# Altium PCB front-panel.PcbDoc
Units mm, origin at the board's own origin, x right, y up, seen from the top; angles counter-clockwise.
Board outline 208 x 111 mm, 2 copper layers (Top Layer, Bottom Layer), stack 1.27 mm thick; 3 components, 3 nets, 38 pads, 32 vias.
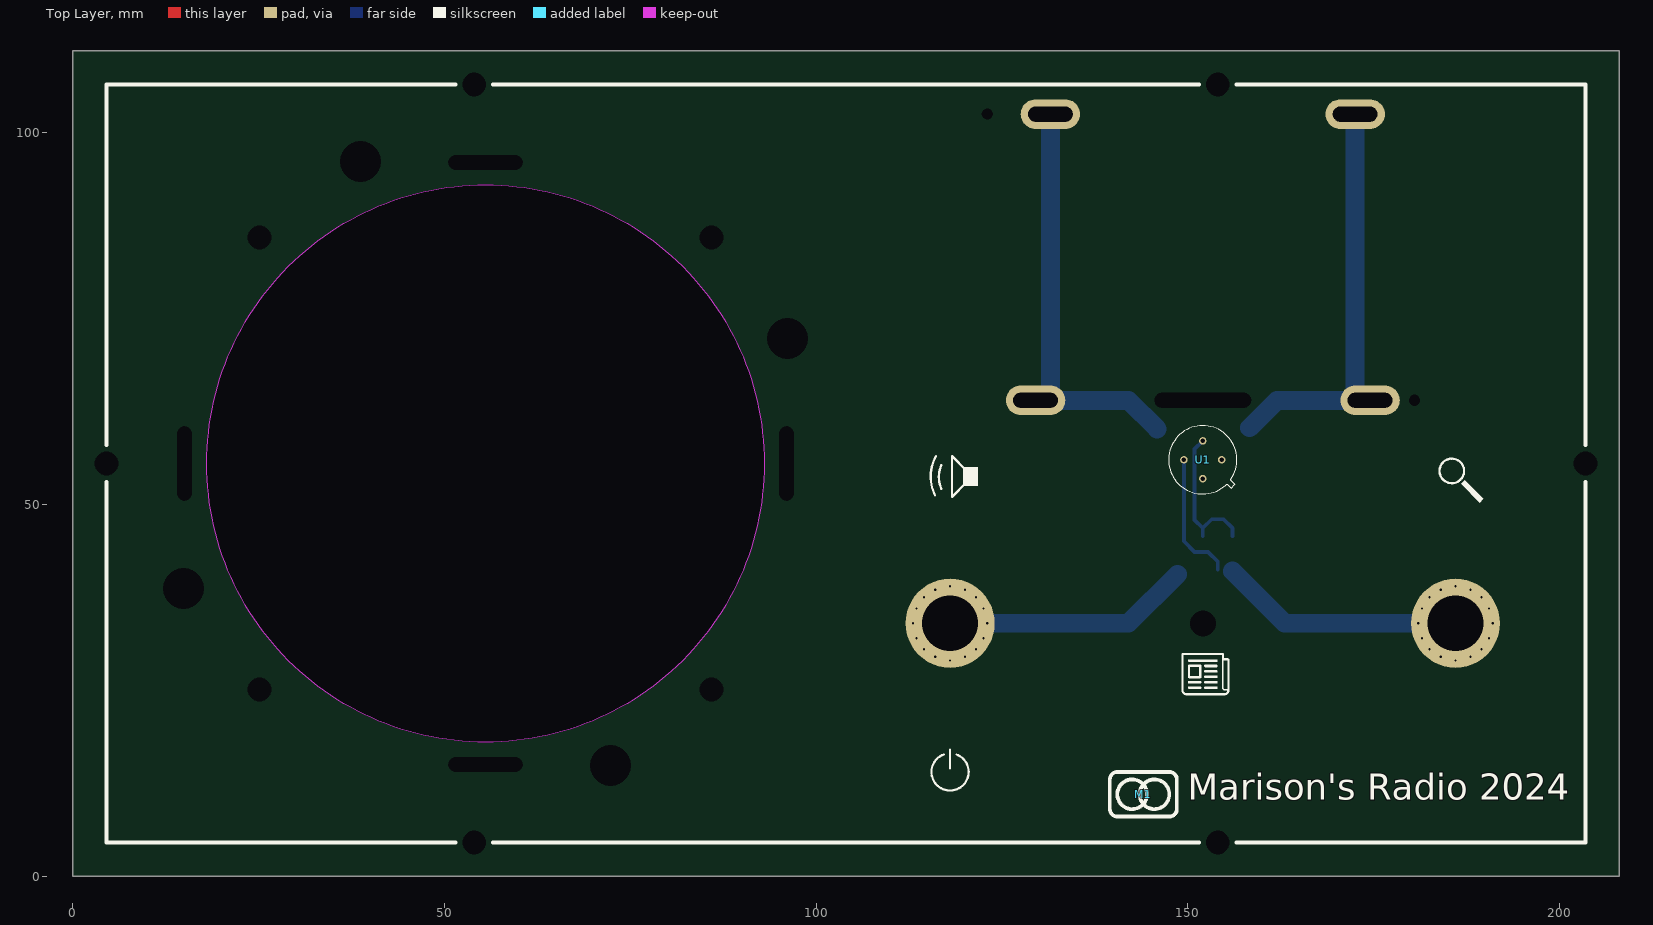
[diagram p0: Top Layer view]
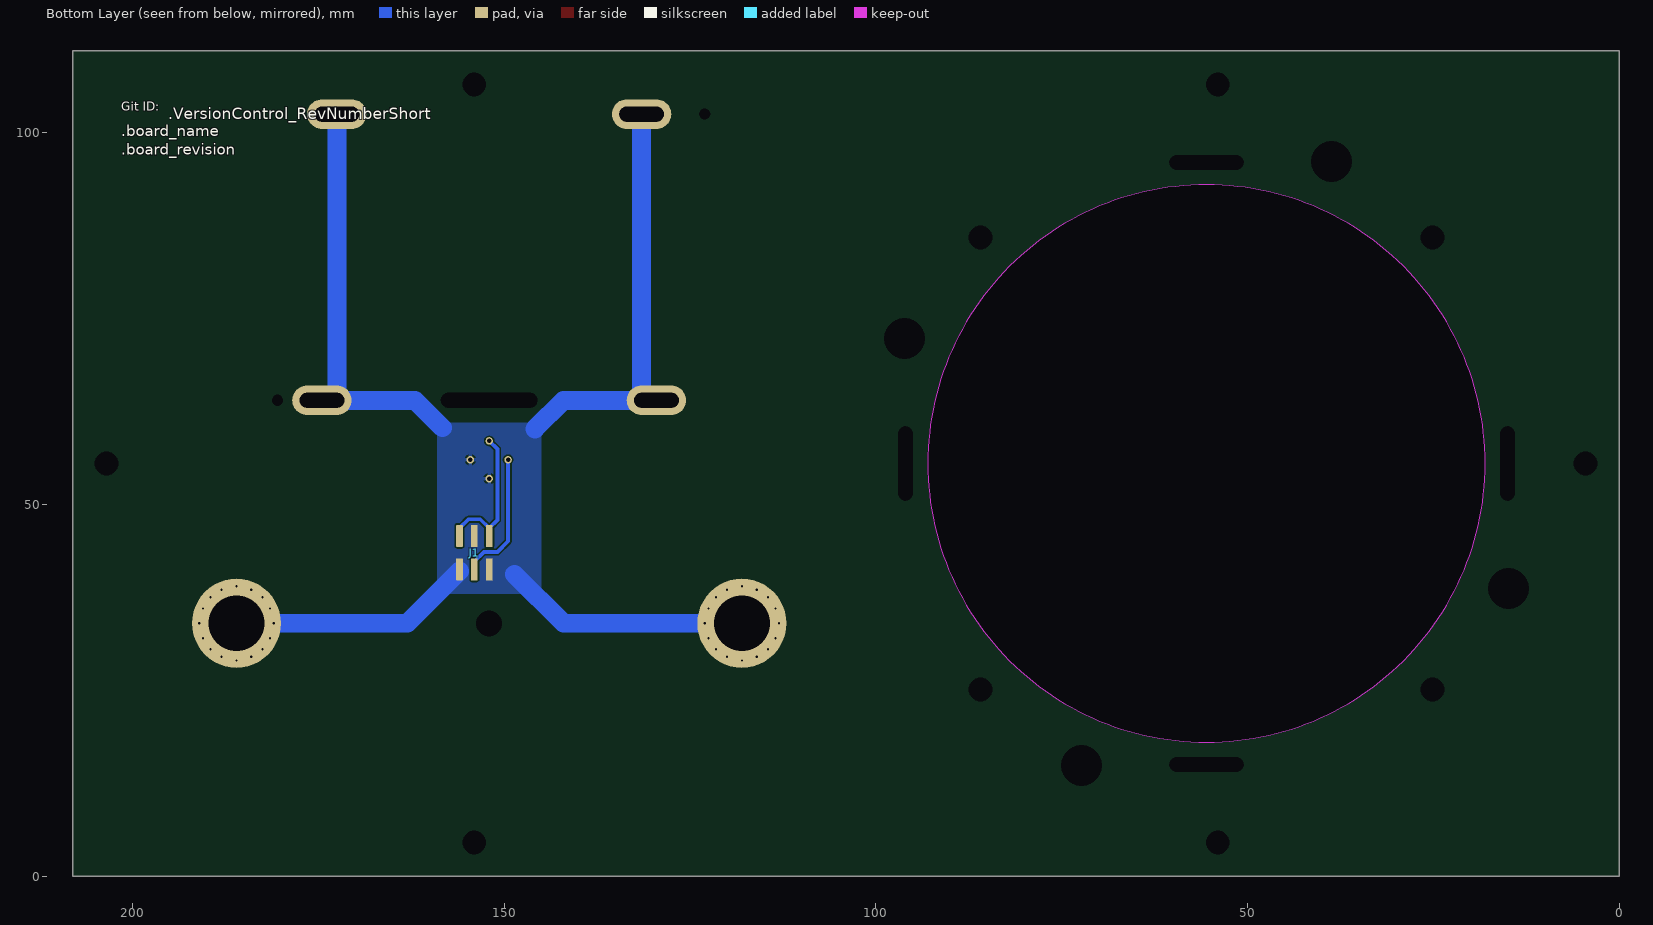
[diagram p1: Bottom Layer view, seen from below]

## Layer stack, top to bottom
Top Solder: solder mask 0.0254, SM-001, Dk 4
Top Layer: signal copper 0.035
Dielectric: core 1.2, Core-042, Dk 4.6
Bottom Layer: signal copper 0.035
Bottom Solder: solder mask 0.0254, SM-001, Dk 4

## Board outline
0,0 0,111 208,111 208,0
cut-out: 55.5,18 cw(c55.5,55.5) 18,55.5 cw(c55.5,55.5) 55.5,93 cw(c55.5,55.5) 93,55.5 cw(c55.5,55.5)

## Design rules (kind name [scope] priority, off if disabled: settings)
BoardOutlineClearance [IsElectrical or IsPoly] p1: gap=0.4 ignorepadtopadclearanceinfootprint=FALSE
Clearance Clearance_NTPH_to_Track [IsTrack vs IsPad and IsThruPin and not PadIsPlated] p1: gap=0.254 ignorepadtopadclearanceinfootprint=FALSE
Clearance Clearance_TH_Pad_to_TH_Pad [IsPad and IsThruPin vs IsPad and IsThruPin] p2: gap=0.5 ignorepadtopadclearanceinfootprint=FALSE
Clearance Clearance_SMT_Pad_to_SMT_Pad [IsPad and IsSMTPin vs IsPad and IsSMTPin] p3: gap=0.127 ignorepadtopadclearanceinfootprint=TRUE
Clearance [All] p4: gap=0.2 ignorepadtopadclearanceinfootprint=FALSE except(0.127: SMDPad-SMDPad)
DiffPairsRouting DiffpairThermal [InDifferentialPair('K1') or InDifferentialPair('K2')] p1: maxlimit=0.254 minlimit=0.254 mostfreqgap=0.254 toplayer_minwidth=0.381 toplayer_maxwidth=0.381 toplayer_prefwidth=0.381 bottomlayer_minwidth=0.381 bottomlayer_maxwidth=0.381 bottomlayer_prefwidth=0.381 maxuncoupledlength=12.7
DiffPairsRouting USB_ext_layer_JLCPCB_4layer_7628 [InDifferentialPair('USB')] p2: maxlimit=0.35 minlimit=0.35 mostfreqgap=0.35 toplayer_minwidth=0.33 toplayer_maxwidth=0.33 toplayer_prefwidth=0.33 bottomlayer_minwidth=0.33 bottomlayer_maxwidth=0.33 bottomlayer_prefwidth=0.33 maxuncoupledlength=12.7
HoleSize NPTH_HoleSize [IsPad And not PadIsPlated] p1: absolutevalues=TRUE maxlimit=2.7 minlimit=0.2 maxpercent=80.000 minpercent=20.000
HoleSize Pad_HoleSize [IsPad] p2: absolutevalues=TRUE maxlimit=2.7 minlimit=0.5 maxpercent=80.000 minpercent=20.000
HoleSize Via_HoleSize [IsVia] p3: absolutevalues=TRUE maxlimit=6.3 minlimit=0.2 maxpercent=80.000 minpercent=20.000
HoleToHoleClearance [All] p1: gap=0.254 allowstackedmicrovias=FALSE
MatchedLengths USB [InDifferentialPair('USB')] p1: tolerance=0.15 checknetsindiffpair=TRUE checkdiffpairvsdiffpair=FALSE checkxsignals=FALSE checkothers=FALSE
MinimumAnnularRing [All] p1: minimumring=0.13
PolygonConnect [All] p1: thpad.connectstyle=Relief thpad.reliefconductorwidth=0.5 thpad.reliefentries=4 thpad.polygonreliefangle="90 Angle" thpad.airgapwidth=0.254 smdpad.connectstyle=Direct smdpad.reliefconductorwidth=0.5 smdpad.reliefentries=4 smdpad.polygonreliefangle="90 Angle" smdpad.airgapwidth=0.254 via.connectstyle=Direct via.reliefconductorwidth=0.5 via.reliefentries=4 via.polygonreliefangle="90 Angle" via.airgapwidth=0.254
RoutingVias [All] p1: holewidth=0.3 width=0.6 viastyle="Through Hole" minholewidth=0.2 minwidth=0.4 maxholewidth=0.711 maxwidth=1.27
SolderMaskExpansion SolderMaskExpansion_Via [IsVia] p1: expansion=0.102 istentingtop=TRUE
SolderMaskExpansion SolderMaskExpansion_notVia [not IsVia] p2: expansion=0.05 istentingtop=FALSE
Width [All] p1: maxlimit=2.54 minlimit=0.09 preferedwidth=0.25
27 further rules are at their usual default settings.

## Components (designator, comment, footprint, x,y, rotation, side; value= is the part's Value field where it differs from the comment)
J1 "62100621921" 62100621921 154,43.5 r270 bottom
M1 "Logo" LOGO_9x6mm 144,11 r180 top
U1 "BS412" BS412-Footprint-1 152,56 r180 top

## Footprints (in the part's own frame and the unit in brackets; to place one, negate y for a bottom-side part, rotate by r counter-clockwise, add the part's x,y. Pads: shape width x height; smd on the part's side, far side on the other; paste and mask are expansions set on the pad)
62100621921 [mm] "Pin Header, pitch 2.00 mm, SMD, Vertical, dual row, 6p"
  rrect25% 3x0.89 smd: 1(-2.25,2) 2(2.25,2) 3(-2.25,0) 4(2.25,0) 5(-2.25,-2) 6(2.25,-2)
  body extent -3.1,-3 3.1,3, height 6.7
BS412-Footprint-1 [mm]
  round 1 hole 0.6: 1(0,2.54) 2(-2.54,0) 3(0,-2.54) 4(2.54,0)
  silkscreen extent -4.6,-4.6 4.6,4.6, body extent -4.61,-4.61 4.61,4.61, height 4.2
LOGO_9x6mm [mm]
  silkscreen extent -4.5,-3 4.5,3

## Part data
J1: library part CMP-045-000367-4, "WR-PHD Pin Header, SMT, pitch 2mm, Dual Row, Vertical, 6p", Contact Resistance=20mOhm, JLCPCB Part #=C3294482, Manufacturer="Wurth Elektronik", Operating Temperature="-40 to +105degC", Rated Current=2A, Withstanding Voltage=500VAC, Working Voltage=200VAC, Component Type=Standard, ComponentLink1Description=Manufacturer, ComponentLink1URL=http://www.we-online.de, ComponentLink2Description=Datasheet, ComponentLink2URL=https://www.we-online.com/catalog/datasheet/62100621921.pdf, Design Item ID=62100621921, Gender="Pin Header", Manufacturer Part Number=62100621921, Mounting Technology=SMT, Orientation=Vertical, Packaging=Tube, Pin Count=6, Pin Number=6, Pitch=2mm, Row Number=Dual, Source="WR-PHD_Pin Header.SchLib"
U1: library part CMP-001-0045-3, "Mini Basic PIR Sensor - BS412", JLCPCB Part #=C410378

## Free pads (board coordinates)
  rrect25% 0x0 hole 3.2 unplated: 0(4.5,55.5) 0(54,4.5) 0(54,106.5) 0(154,4.5) 0(154,106.5) 0(203.5,55.5) 5(25.094,25.094) 5(25.094,85.906) 5(85.906,25.094) 5(85.906,85.906)
  rrect25% 0x0 hole 5.5 unplated: 0(14.849,38.662) 0(38.662,96.151) 0(72.338,14.849) 0(96.151,72.338)
  rrect25% 0x0 hole 2 slot 10 at 90 deg unplated: 0(15,55.5) 0(96,55.5)
  rrect25% 0x0 hole 2 slot 10 at 0 deg unplated: 0(55.5,15) 0(55.5,96)
  oval 8x4 hole 2 slot 6 at 0 deg unplated: 0(129.5,64) 0(131.5,102.5) 0(172.5,102.5) 0(174.5,64)
  rrect25% 0x0 hole 2 slot 13 at 0 deg unplated: 0(152,64)
  rrect25% 0x0 hole 1.5 unplated: 7(123,102.5) 8(180.5,64)
  round 12 hole 7.5 unplated: 9(118,34) 11(186,34)
  rrect25% 0x0 hole 3.5 unplated: 10(152,34)

## Via types
v1: diameter 0.6, hole 0.3, Top Layer to Bottom Layer, tented both sides, 32 vias

## Nets (pads, with @x,y where several pads share a name; then routed paths per layer and width w, separated by ;. In a path a pad name is that pad's centre, name@x,y a point inside that pad or via, vN(x,y) a via of type N, cw(c..) or ccw(c..) an arc to the next point about the centre after c; other vN are vias at no path point)
+3V3: J1.1 J1.5 U1.3 | length 19.7
  Bottom Layer w0.5: J1.1 J1.1@152,46.805 ; U1.3 150.9,57.44 150.9,47.905 J1.1@152,46.805 ; J1.5 156,46.805 154.805,48 153.195,48 J1.1@152,46.805
GND: J1.2 J1.3 J1.6 pad.0@129.5,64 pad.0@131.5,102.5 pad.0@172.5,102.5 pad.0@174.5,64 pad.9 pad.11 U1.1 U1.2 | length 178.5
  Bottom Layer w2.54: pad.9 142,34 148.599,40.599 ; pad.0@129.5,64 131.5,64 142,64 145.847,60.153 ; pad.0@131.5,64.674 pad.0@131.5,102.5 ; J1.6@156,41.02 156,41 163,34 pad.11 ; 158.304,60.304 162,64 pad.0@173.174,64 ; pad.0@172.5,102.5 172.5,64.674 pad.0@173.174,64 ; pad.0@174.5,64 pad.0@173.174,64
  other v1: 118,29 186,29 116,29.5 120,29.5 184,29.5 188,29.5 114.5,30.5 121.5,30.5 182.5,30.5 189.5,30.5 113.5,32 122.5,32 181.5,32 190.5,32 113,34 123,34 181,34 191,34 113.5,36 122.5,36 181.5,36 190.5,36 114.5,37.5 121.5,37.5 182.5,37.5 189.5,37.5 116,38.5 120,38.5 184,38.5 188,38.5 118,39 186,39
NetJ1_4: J1.4 U1.4 | length 17.7
  Bottom Layer w0.5: U1.4 149.46,45.04 150.9,43.6 152.705,43.6 154,42.305 J1.4

## Polygon pours and split planes (outlines as drawn)
GND on Bottom Layer "NONET_L-01_P-001" (solid, remove dead copper, pour order 0): 145,38 159,38 159,61 145,61

## Silkscreen, mask and mechanical layers (free items; w line width, h text height)
Top Overlay:
  drawing of 31 lines, arcs and shapes, not listed
  text "Marison's Radio 2024" at 150,9.09 h6
Bottom Overlay:
  text "Git ID:" at 201.5,102.521 h2
  text ".VersionControl_RevNumberShort" at 195.2,101.8 h1.5
  text ".board_name" at 201.5,99 h2.5
  text ".board_revision" at 201.5,96.5 h2.5
Fab Notes:
  text "Solder mask color : Black / Silkscreen color : White / PCB Thickness : 1.2mm" at 217,104 h2
Board Outline:
  circle w0.1: c55.5,55.5 r37.5
  lines w0.1: 0,0 208,0 208,111 0,111 0,0
Top 3D Body:
  circle w0.1: c118,34 r15
Top Assembly:
  circle w0.3: c55.5,55.5 r48